# Altium PCB CAN_USB_M_V1.PcbDoc
Units mm, origin at the board's own origin, x right, y up, seen from the top; angles counter-clockwise.
Board outline 13.93 x 19 mm, 2 copper layers (Top Layer, Bottom Layer); 12 components, 15 nets, 53 pads, 12 vias.
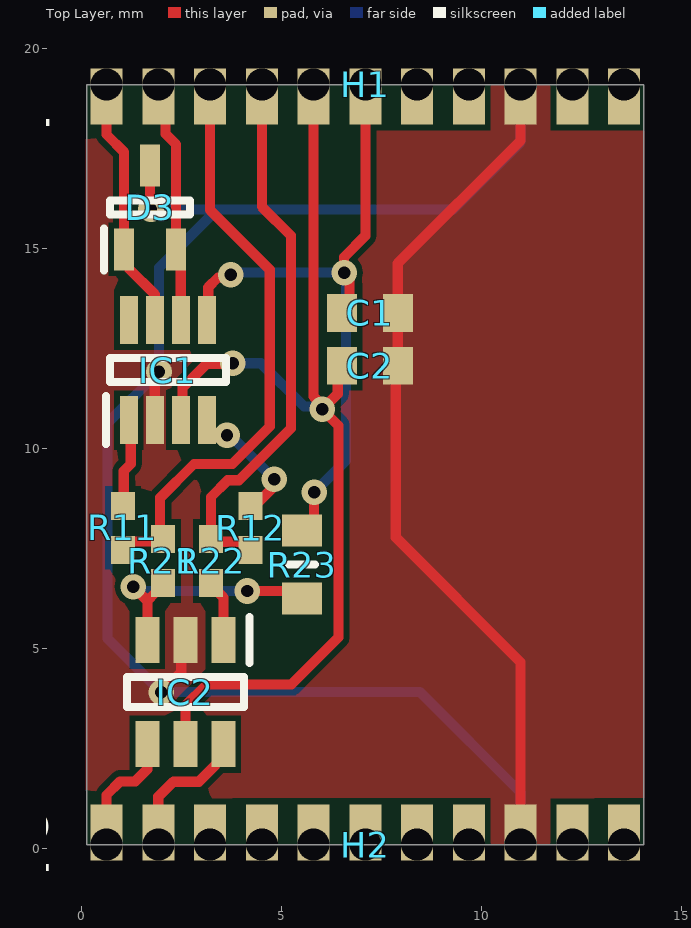
[diagram p0: Top Layer view]
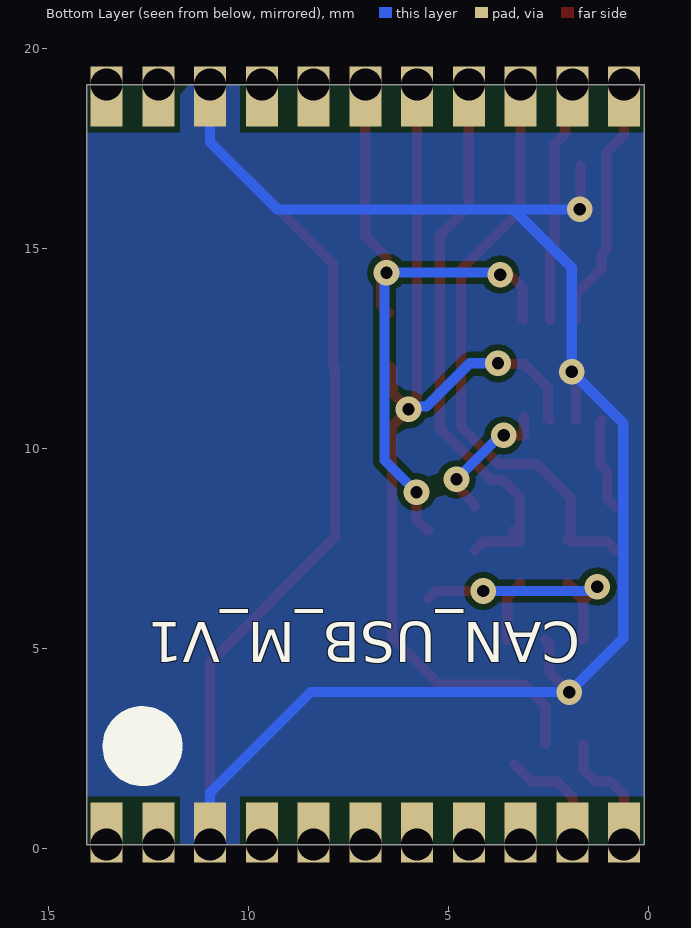
[diagram p1: Bottom Layer view, seen from below]
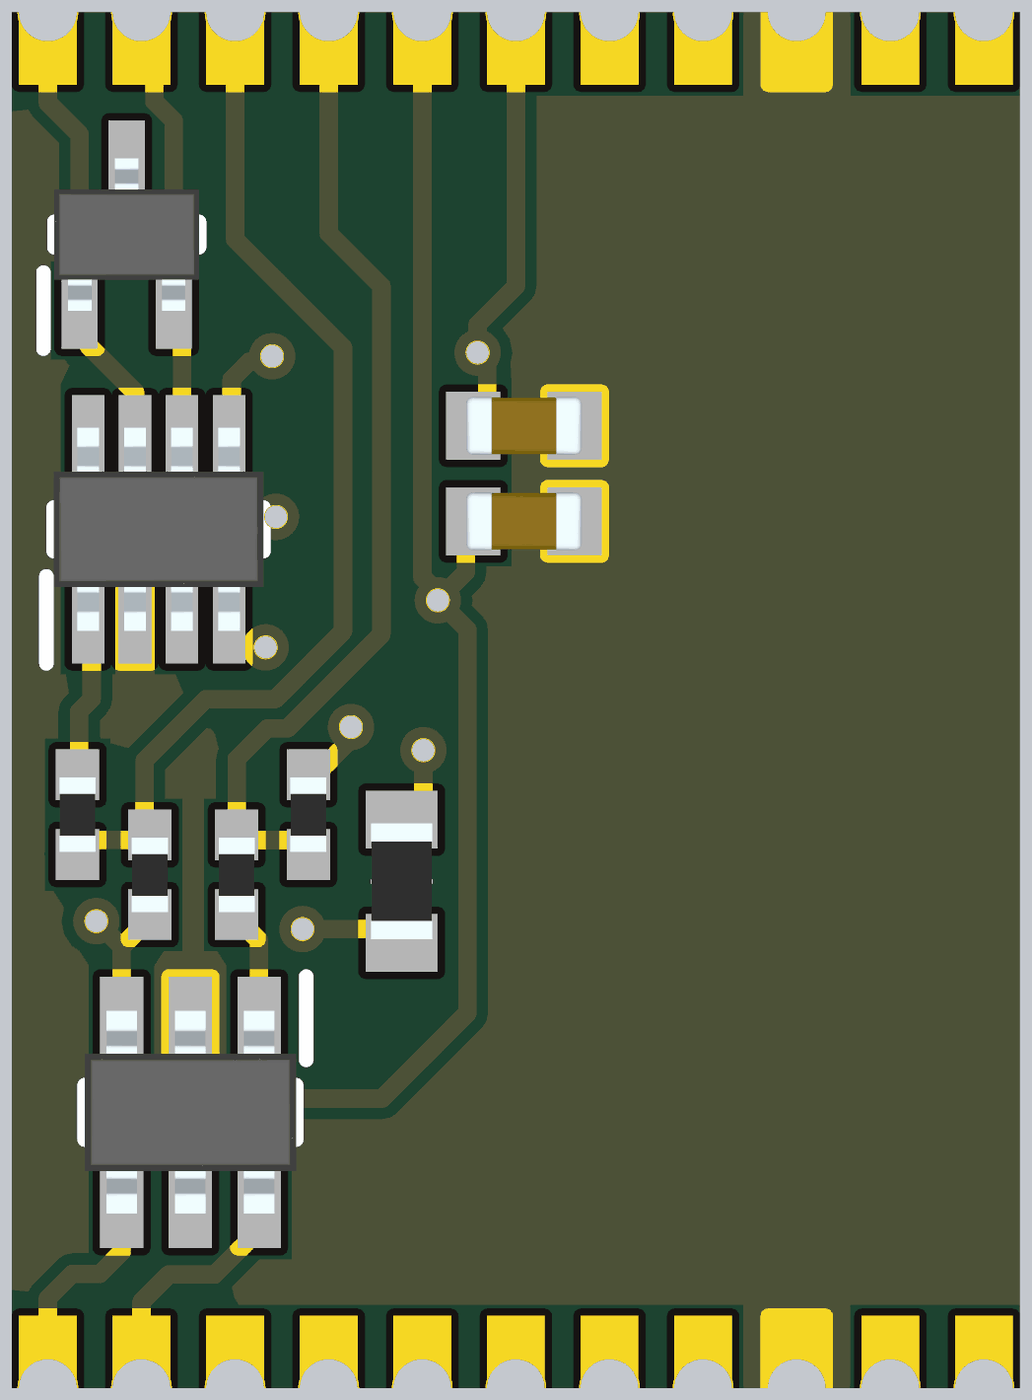
[diagram p2: 3D render of the assembled board from above, using the file's embedded part models]

## Layer stack, top to bottom
Top Solder: solder mask 0.0102, Solder Resist, Dk 3.5
Top Layer: signal copper 0.0356
Dielectric 1: dielectric 0.32, FR-4, Dk 4.8
Bottom Layer: signal copper 0.0356
Bottom Solder: solder mask 0.0102, Solder Resist, Dk 3.5

## Board outline
0.12,0.11 0.12,19.11 14.054,19.11 14.054,0.11

## Design rules (kind name [scope] priority, off if disabled: settings)
AssemblyTestPointUsage SilkToBoardRegionClearance_1 [All] p2:
AssemblyTestPointUsage SilkToBoardRegionClearance [All] p3:
Clearance [All] p1: gap=0.152 ignorepadtopadclearanceinfootprint=FALSE except(0: Arc-Hole Track-Hole SMDPad-Hole THPad-Hole Via-Hole Fill-Hole Poly-Hole Region-Hole Text-Hole)
HoleSize [All] p1: absolutevalues=TRUE maxlimit=6.35 minlimit=0.3 maxpercent=80.000 minpercent=20.000
MatchedLengths DiffPair_DIFF100MatchedLengths [InDifferentialPairClass('DIFF100')] p1: tolerance=0.152 checknetsindiffpair=TRUE checkdiffpairvsdiffpair=FALSE checkxsignals=FALSE checkothers=FALSE usedelayunits=FALSE
MinimumSolderMaskSliver [All] p1: minsoldermaskwidth=0.1
MinimumSolderMaskSliver SilkscreenOverComponentPads_2 [All] p2: minsoldermaskwidth=0.254
MinimumSolderMaskSliver SilkToSolderMaskClearance_1 [IsPad] p3: minsoldermaskwidth=0.254
MinimumSolderMaskSliver SilkscreenOverComponentPads_1 [All] p4: minsoldermaskwidth=0.254
MinimumSolderMaskSliver SilkToSolderMaskClearance [IsPad] p5: minsoldermaskwidth=0.254
MinimumSolderMaskSliver SilkscreenOverComponentPads [All] p6: minsoldermaskwidth=0.254
PolygonConnect [All] p1: connectstyle=Direct reliefconductorwidth=0.254 reliefentries=4 polygonreliefangle="90 Angle" airgapwidth=0.254
RoomDefinition CAN_USB_M_V1 [InComponentClass('CAN_USB_M_V1')] p1: confinementstyle=ConfineIn formatcopy=TRUE lockcomponents=FALSE outline -0.01,-0.52 14.24,-0.52 14.24,19.7 -0.01,19.7
RoutingVias [All] p1: holewidth=0.305 width=0.635 viastyle="Through Hole" minholewidth=0.305 minwidth=0.635 maxholewidth=0.711 maxwidth=1.27
SilkToBoardRegionClearance SilkToBoardRegionClearance_2 [All] p1:
SilkToSolderMaskClearance SilkToSolderMaskClearance_2 [IsPad] p1: minsilkscreentomaskgap=0.254 clearancetoexposedcopper=TRUE
SolderMaskExpansion [All] p1: expansion=0.102
Width [All] p1: maxlimit=2.54 minlimit=0.152 preferedwidth=0.254
26 further rules are at their usual default settings.

## Components (designator, comment, footprint, x,y, rotation, side; value= is the part's Value field where it differs from the comment)
C1 "C0603C104K8RACTU" CAPC1608X90N 7.2,13.4 r180 top
C2 "C0603C104K8RACTU" CAPC1608X90N 7.2,12.08 r180 top
D3 "ESDCAN05-2BWY" SOT65P210X110-3N 1.71,16.04 r90 top
H1 "CASTELLATED 11 pin" "CASTELLATED 11 pin" 13.558,19.11 r180 top locked
H2 "CASTELLATED 11 pin" "CASTELLATED 11 pin" 0.62,0.11 r0 top locked
IC1 "TCAN1044VDDFRQ1" SOT65P280X110-8N 2.15,11.97 r90 top
IC2 "USBLC6-2SC6" SOT95P280X145-6N 2.59,3.92 r270 top
R11 "RK73Z1ETTP" RESC1005X40N 1.03,8.03 r90 top
R12 "RK73Z1ETTP" RESC1005X40N 4.22,8.03 r90 top
R21 "RK73Z1ETTP" RESC1005X40N 2.03,7.2 r270 top
R22 "RK73Z1ETTP" RESC1005X40N 3.23,7.2 r270 top
R23 "ERJ-PB3B1501V" RESC1608X55N 5.51,7.11 r90 top

## Footprints (in the part's own frame and the unit in brackets; to place one, negate y for a bottom-side part, rotate by r counter-clockwise, add the part's x,y. Pads: shape width x height; smd on the part's side, far side on the other; paste and mask are expansions set on the pad)
CAPC1608X90N [mm]
  rect 0.75x0.94 smd: 1(-0.7,0) 2(0.7,0)
  body extent -0.8,-0.4 0.8,0.4, height 0.9
"CASTELLATED 11 pin" [mm]
  rect 0.8x1.4 / inner rect 0.8x1.5 / far side rect 0.8x1.5 hole 0.8 copper offset 0,0.3: 1(0,0) 2(1.294,0) 3(2.587,0) 4(3.881,0) 5(5.175,0) 6(6.469,0) 7(7.762,0) 8(9.056,0) 9(10.35,0) 10(11.644,0) 11(12.938,0)
RESC1005X40N [mm]
  rect 0.7x0.6 smd: 1(-0.55,0) 2(0.55,0)
  body extent -0.51,-0.25 0.51,0.25, height 0.4
RESC1608X55N [mm]
  rect 0.8x1 smd: 1(-0.85,0) 2(0.85,0)
  silkscreen extent 0,-0.33 0,0.33, body extent -0.8,-0.43 0.8,0.43, height 0.55
SOT65P210X110-3N [mm]
  rect 1.05x0.5 smd: 1(-1.05,0.65) 2(-1.05,-0.65) 3(1.05,0)
  silkscreen extent -1.58,-1 0.18,1.15, body extent -1.05,-1 1.05,1, height 1.1
SOT65P280X110-8N [mm]
  rect 1.2x0.45 smd: 1(-1.25,0.975) 2(-1.25,0.325) 3(-1.25,-0.325) 4(-1.25,-0.975) 5(1.25,-0.975) 6(1.25,-0.325) 7(1.25,0.325) 8(1.25,0.975)
  silkscreen extent -1.85,-1.45 0.3,1.55, body extent -1.4,-1.45 1.4,1.45, height 1.1
SOT95P280X145-6N [mm]
  rect 1.15x0.6 smd: 1(-1.3,0.95) 2(-1.3,0) 3(-1.3,-0.95) 4(1.3,-0.95) 5(1.3,0) 6(1.3,0.95)
  silkscreen extent -1.88,-1.46 0.38,1.6, body extent -1.4,-1.46 1.4,1.46, height 1.45

## Part data
C1 C2: "Capacitor", Manufacturer_Name=Kemet, Supplier Part Number 1=80-C0603C104K8R, Datasheet Link=https://search.kemet.com/component-edge/download/specsheet/C0603C104K8RACTU.pdf, Height=0.9mm, Manufacturer_Part_Number=C0603C104K8RACTU, Supplier 1=Mouser
D3: "TVS Diode (Bi-directional)", Manufacturer_Name=STMicroelectronics, Mouser2 Part Number=511-ESDCAN05-2BWY, Datasheet Link=https://componentsearchengine.com//ESDCAN05-2BWY.pdf, Height=1.1mm, Manufacturer_Part_Number=ESDCAN05-2BWY, Mouser2 Price/Stock=https://www.mouser.com/Search/Refine.aspx?Keyword=511-ESDCAN05-2BWY, Supplier 1=Mouser, Supplier Part Number 1=511-ESDCAN05-2BWY
IC1: "Integrated Circuit", Manufacturer_Name="Texas Instruments", Supplier Part Number 1=595-TCAN1044VDDFRQ1, Datasheet Link=https://www.ti.com/lit/gpn/TCAN1044V-Q1, Height=1.1mm, Manufacturer_Part_Number=TCAN1044VDDFRQ1, Supplier 1=Mouser
IC2: "Integrated Circuit", Manufacturer_Name=STMicroelectronics, Mouser2 Part Number=511-USBLC6-2SC6, Datasheet Link=https://componentsearchengine.com//USBLC6-2SC6.pdf, Height=1.45mm, Manufacturer_Part_Number=USBLC6-2SC6, Mouser2 Price/Stock=https://www.mouser.com/Search/Refine.aspx?Keyword=511-USBLC6-2SC6, Supplier 1=Mouser, Supplier Part Number 1=511-USBLC6-2SC6
R11 R12 R21 R22: "Resistor", Manufacturer_Name="KOA Speer", Supplier Part Number 1=660-RK73Z1ETTP, Height=0.4mm, Manufacturer_Part_Number=RK73Z1ETTP, Supplier 1=Mouser
R23: "Resistor", Manufacturer_Name=Panasonic, Supplier Part Number 1=667-ERJ-PB3B1501V, Datasheet Link=https://industrial.panasonic.com/cdbs/www-data/pdf/RDM0000/AOA0000C328.pdf, Height=0.55mm, Manufacturer_Part_Number=ERJ-PB3B1501V, Supplier 1=Mouser

## Via types
v1: diameter 0.64, hole 0.31, Top Layer to Bottom Layer, tented both sides, 12 vias

## Nets (pads, with @x,y where several pads share a name; then routed paths per layer and width w, separated by ;. In a path a pad name is that pad's centre, name@x,y a point inside that pad or via, vN(x,y) a via of type N, cw(c..) or ccw(c..) an arc to the next point about the centre after c; other vN are vias at no path point)
CAN_H: D3.1 H1.11 IC1.7 | length 6.4
  Top Layer w0.254: H1.11 0.62,17.86 1.06,17.42 D3.1 1.183,14.867 1.183,14.507 1.825,13.865 IC1.7
CAN_L: D3.2 H1.10 IC1.6 | length 6.1
  Top Layer w0.254: H1.10 2.092,18.932 2.092,17.878 2.36,17.61 D3.2 2.475,14.875 IC1.6
CAN_RX: IC1.4 R12.2 | length 3.5
  Top Layer w0.254: IC1.4@3.11,10.79 3.13,10.81 3.13,10.725 IC1.4 3.125,10.34 v1(3.63,10.34) ; R12.2@4.36,8.56 4.36,8.62 4.81,9.07 v1(4.81,9.24)
  Bottom Layer w0.254: v1(3.63,10.34) 3.71,10.34 v1(4.81,9.24)
CAN_TX: IC1.1 R11.2 | length 2.3
  Top Layer w0.254: R11.2@0.86,8.56 1.05,8.75 1.05,9.45 1.225,9.625 1.225,10.67 IC1.1
D1: H1.8 R12.1 R22.1 | length 14.2
  Top Layer w0.254: R22.1@3.403,7.953 R22.1@3.23,7.78 ; R12.1@4.36,7.46 4.14,7.68 3.23,7.68 R22.1 R22.1@3.23,7.78 ; H1.8 4.502,16.058 5.23,15.33 5.23,10.518 3.932,9.219 3.649,9.219 3.23,8.8 R22.1@3.23,7.78
D2: H1.9 R11.1 R21.1 | length 14.9
  Top Layer w0.254: R11.1@0.86,7.46 0.86,7.51 1.033,7.683 1.963,7.683 R21.1 ; R21.1@1.959,7.821 1.959,8.779 2.806,9.626 3.763,9.626 4.699,10.562 4.699,14.481 3.208,15.972 H1.9
D5: H2.10
D6: H2.11
GND: C1.1 C2.1 D3.3 H1.3 H2.9 IC1.2 IC2.2 | length 62
  Top Layer w0.254: D3.3 1.71,16.01 v1(1.73,15.99) ; IC1.2 1.825,11.721 1.93,11.826 v1(1.93,11.93) ; v1(1.99,3.92) 2.487,4.417 2.487,5.117 IC2.2 ; H2.9 10.97,4.67 7.85,7.79 7.85,12.03 C2.1 C1.1 7.9,14.64 10.971,17.711 H1.3
  Bottom Layer w0.254: v1(1.73,15.99) 3.39,15.99 ; H2.9 10.97,1.41 8.46,3.92 v1(1.99,3.92) 0.641,5.269 0.641,10.641 v1(1.93,11.93) 1.93,14.53 3.39,15.99 ; H1.3 10.971,17.671 9.29,15.99 3.39,15.99
IO3: H2.2 IC2.6 | length 3
  Top Layer w0.254: H2.2 1.914,1.304 2.29,1.68 2.924,1.68 IC2.6@3.353,2.109
IO4: H2.1 IC2.4 | length 3.2
  Top Layer w0.254: H2.1 0.62,1.35 0.96,1.69 1.34,1.69 1.64,1.99 IC2.4
USB_DM1: IC2.1 R22.2 | length 1.6
  Top Layer w0.254: R22.2 3.23,6.6 3.54,6.29 IC2.1
USB_DP1: IC2.3 R21.2 R23.1 | length 6.4
  Top Layer w0.254: v1(1.29,6.56) 1.29,6.555 1.64,6.205 ; IC2.3 1.64,6.205 ; R21.2 1.857,6.477 1.857,6.422 1.64,6.205 ; v1(4.14,6.45) 5.32,6.45 R23.1
  Bottom Layer w0.254: v1(1.29,6.56) 1.4,6.45 v1(4.14,6.45)
VCC2: C1.2 H1.6 IC1.5 R23.2 | length 17.4
  Top Layer w0.254: IC1.5 3.16,13.255 3.16,14.04 3.406,14.286 3.646,14.286 v1(3.72,14.36) ; R23.2 5.537,7.96 5.81,8.233 v1(5.81,8.92) ; C1.2 6.69,13.59 6.69,14.28 v1(6.56,14.41) 6.56,14.8 7.09,15.329 H1.6
  Bottom Layer w0.254: v1(3.72,14.36) 3.74,14.34 3.81,14.41 v1(6.56,14.41) 6.609,14.361 6.609,9.719 v1(5.81,8.92)
VCC3: C2.2 H1.7 IC1.3 IC2.5 | length 25.9
  Top Layer w0.254: IC1.3 2.52,10.765 2.52,11.53 3.11,12.12 3.75,12.12 v1(3.772,12.142) ; IC2.5 2.59,3.58 3.12,4.11 5.24,4.11 6.42,5.29 6.42,10.58 v1(6.01,10.99) ; H1.7 5.796,11.309 6.01,11.094 v1(6.01,10.99) ; C2.2 6.398,11.978 6.398,11.378 v1(6.01,10.99)
  Bottom Layer w0.254: v1(3.772,12.142) 4.478,12.142 5.556,11.064 5.936,11.064 v1(6.01,10.99)
pads on no net: H1.1 H1.2 H1.4 H1.5 H2.3 H2.4 H2.5 H2.6 H2.7 H2.8 IC1.8

## Polygon pours and split planes (outlines as drawn)
GND on Bottom Layer "GND_L02_P010" (solid, pour order 10): 0.11,19.11 0.11,0.12 14.06,0.12 14.06,19.12
no net on Bottom Layer "NONET_L02_P000" (solid, pour order 0): 0.374,18.271
GND on Top Layer "GND_L01_P012" (solid, pour order 12): 0.1,19.12 0.1,0.1 0.11,0.11 14.06,0.11 14.06,19.11 14.07,19.12

## Silkscreen, mask and mechanical layers (free items; w line width, h text height)
Bottom Overlay:
  circle w1: c12.66,2.57 r0.5
  text "CAN_USB_M_V1" at 1.72,5.67 h1 r180
Mechanical 1:
  pour cut-out: 5.459,12.118
  lines w0.2: 14.054,0.11 14.054,19.11 ; 14.054,0.11 0.12,0.11 0.12,19.11 14.054,19.11